# Altium PCB PCB1.PcbDoc
Units mm, origin at the board's own origin, x right, y up, seen from the top; angles counter-clockwise.
Board outline 100 x 76 mm, 2 copper layers (Top Layer, Bottom Layer), stack 1.599 mm thick; 47 components, 30 nets, 230 pads, 26 vias.
Unrouted connection lines stored in the file: 32.
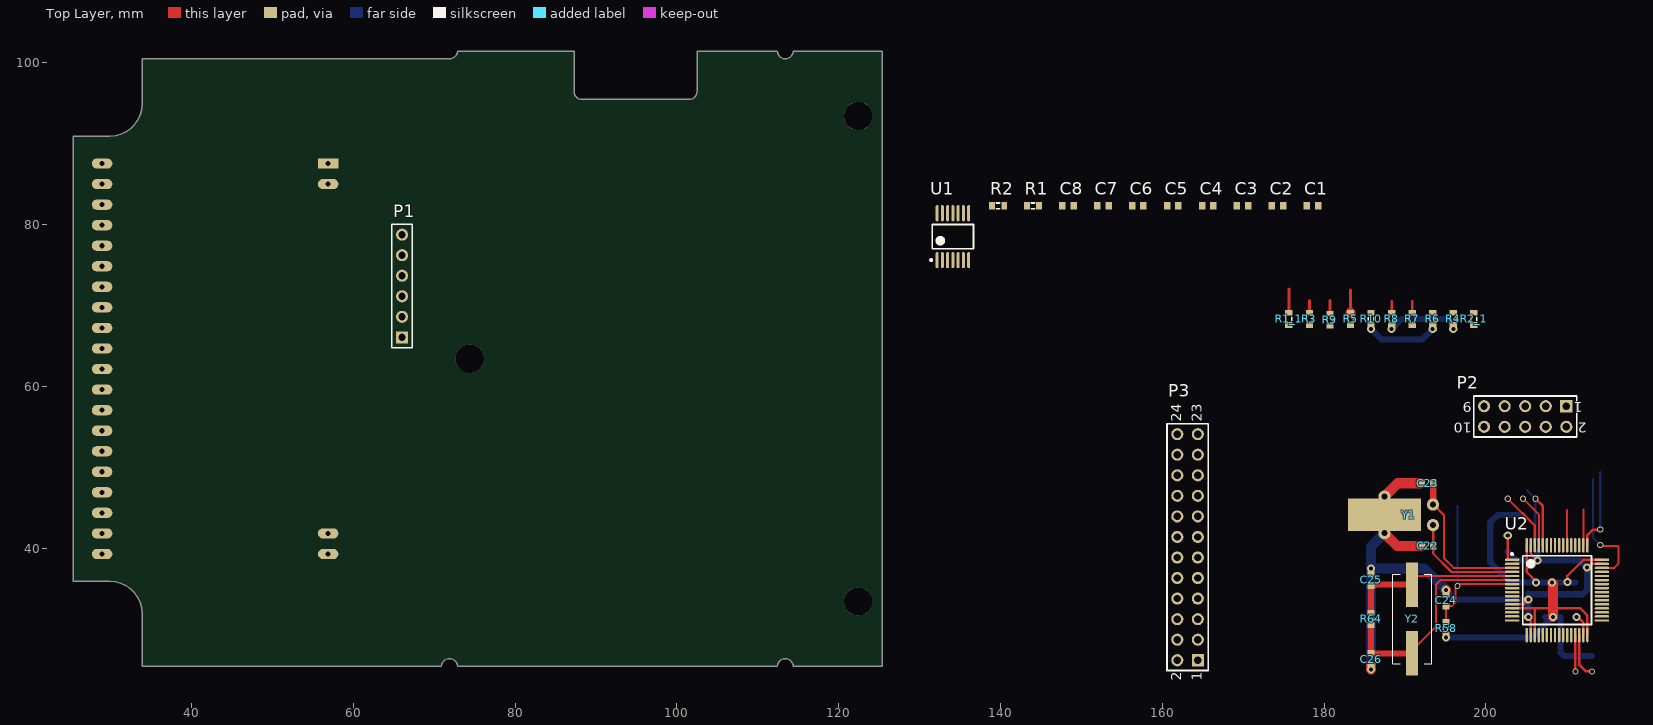
[diagram p0: Top Layer view]
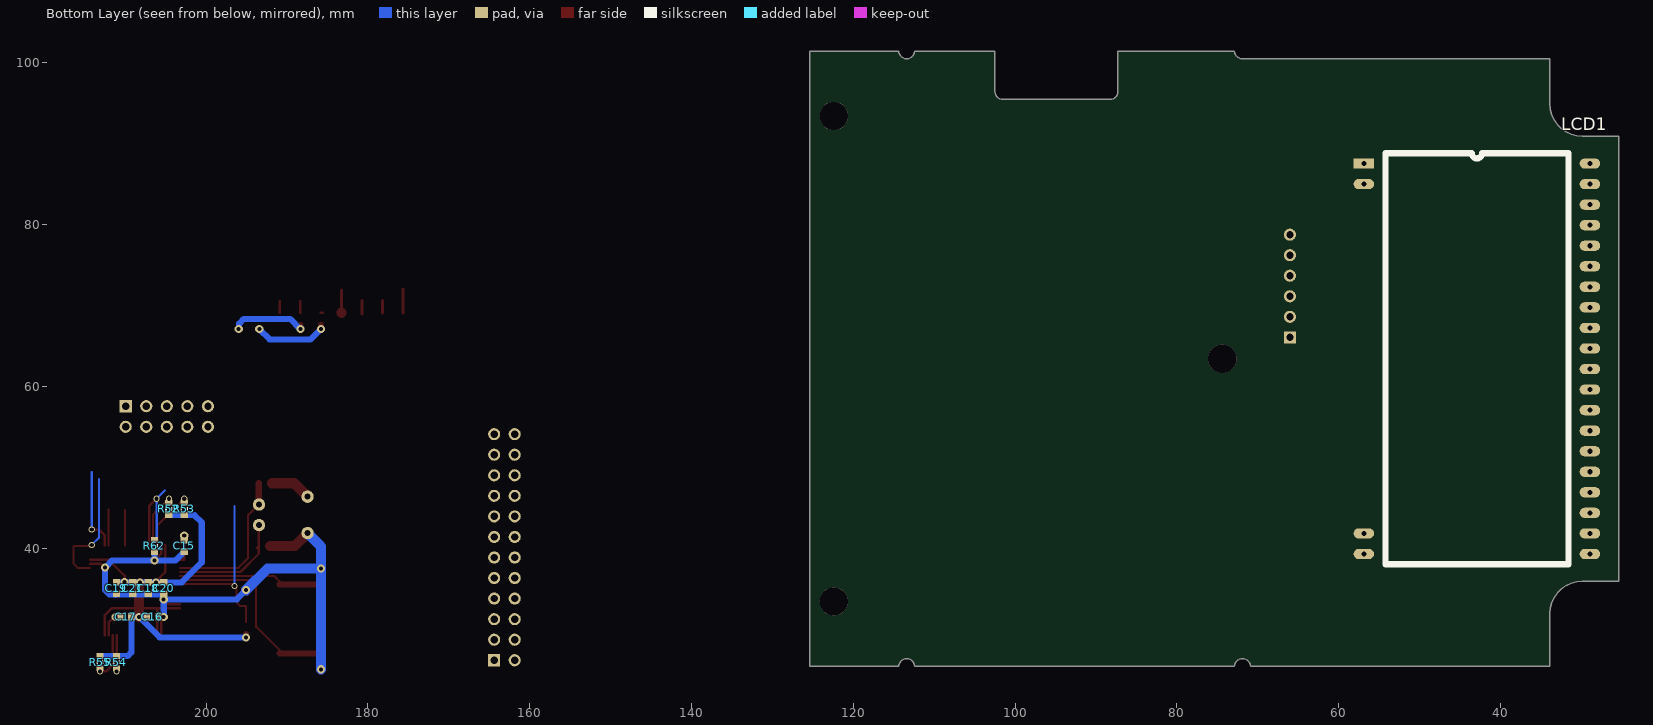
[diagram p1: Bottom Layer view, seen from below]

## Layer stack, top to bottom
Top Solder: solder mask 0.0102, Solder Resist, Dk 3.5
Top Layer: signal copper 0.0356
Dielectric 1: dielectric 1.528, FR-4, Dk 4.8
Bottom Layer: signal copper 0.0356
Bottom Solder: solder mask 0.0102, Solder Resist, Dk 3.5

## Board outline
125.4,25.4 125.4,101.4 114.397,101.4 114.357,101.192 114.274,100.996 114.151,100.823 113.995,100.68 113.812,100.572 113.611,100.506 113.4,100.483 113.189,100.506 112.988,100.572 112.805,100.68 112.649,100.823 112.526,100.996 112.443,101.192 112.403,101.4 102.5,101.4 102.5,96.45 102.475,96.227 102.401,96.016 102.282,95.826 102.123,95.668 101.934,95.549 101.722,95.475 101.5,95.45 88.3,95.45 88.077,95.475 87.866,95.549 87.676,95.668 87.518,95.826 87.399,96.016 87.325,96.227 87.3,96.45 87.3,101.4 72.897,101.4 72.857,101.192 72.774,100.996 72.651,100.823 72.495,100.68 72.312,100.572 72.111,100.506 71.9,100.483 33.9,100.483 33.9,94.9 33.839,94.205 33.659,93.532 33.364,92.9 32.964,92.329 32.471,91.836 31.9,91.436 31.268,91.141 30.595,90.961 29.9,90.9 25.4,90.9 25.4,35.9 29.9,35.9 30.595,35.839 31.268,35.659 31.9,35.364 32.471,34.964 32.964,34.471 33.364,33.9 33.659,33.268 33.839,32.595 33.9,31.9 33.9,25.4 70.903,25.4 70.943,25.608 71.026,25.804 71.149,25.977 71.305,26.12 71.488,26.228 71.689,26.294 71.9,26.317 72.111,26.294 72.312,26.228 72.495,26.12 72.651,25.977 72.774,25.804 72.857,25.608 72.897,25.4 112.403,25.4 112.443,25.608 112.526,25.804 112.649,25.977 112.805,26.12 112.988,26.228 113.189,26.294 113.4,26.317 113.611,26.294 113.812,26.228 113.995,26.12 114.151,25.977 114.274,25.804 114.357,25.608 114.397,25.4

## Design rules (kind name [scope] priority, off if disabled: settings)
BoardOutlineClearance [All] p1: gap=0.254 ignorepadtopadclearanceinfootprint=FALSE
Clearance [All] p1: gap=0.152 ignorepadtopadclearanceinfootprint=FALSE
HoleSize [All] p1: absolutevalues=TRUE maxlimit=6.3 minlimit=0.3 maxpercent=80.000 minpercent=20.000
PlaneConnect [All] p1: pad.planeconnectstyle=Relief pad.reliefexpansion=0.508 pad.reliefentries=4 pad.reliefconductorwidth=0.254 pad.reliefairgap=0.254 via.planeconnectstyle=Direct via.reliefexpansion=0.508 via.reliefentries=4 via.reliefconductorwidth=0.254 via.reliefairgap=0.254
PolygonConnect [All] p1: thpad.connectstyle=Relief thpad.reliefconductorwidth=0.254 thpad.reliefentries=4 thpad.polygonreliefangle="90 Angle" thpad.airgapwidth=0.254 smdpad.connectstyle=Relief smdpad.reliefconductorwidth=0.254 smdpad.reliefentries=4 smdpad.polygonreliefangle="90 Angle" smdpad.airgapwidth=0.254 via.connectstyle=Direct via.reliefconductorwidth=0.254 via.reliefentries=4 via.polygonreliefangle="90 Angle" via.airgapwidth=0.254
RoutingVias [All] p1: holewidth=1.016 width=1.27 viastyle="Through Hole" minholewidth=0.305 minwidth=0.508 maxholewidth=6.299 maxwidth=2.54
SolderMaskExpansion [All] p1: expansion=0.102
Width [All] p1: maxlimit=2.54 minlimit=0.152 preferedwidth=0.635
28 further rules are at their usual default settings.

## Classes and differential pairs
component class Sheet1: C1 C2 C3 C4 C5 C6 C7 C8 P1 R1 R2 U1

## Components (designator, comment, footprint, x,y, rotation, side; value= is the part's Value field where it differs from the comment)
C1 "Cap Semi" 1608[0603] 178.562,82.296 r0 top value=1uF
C2 "Cap Semi" 1608[0603] 174.244,82.296 r0 top value=1uF
C3 "Cap Semi" 1608[0603] 169.926,82.296 r0 top value=1uF
C4 "Cap Semi" 1608[0603] 165.608,82.296 r0 top value=1uF
C5 "Cap Semi" 1608[0603] 161.29,82.296 r0 top value=1uF
C6 "Cap Semi" 1608[0603] 156.972,82.296 r0 top value=1uF
C7 "Cap Semi" 1608[0603] 152.654,82.296 r0 top value=1uF
C8 "Cap Semi" 1608[0603] 148.336,82.296 r0 top value=1uF
C15 "Cap Semi" 1608[0603] 202.692,40.259 r270 bottom value=100nF
C16 "Cap Semi" 1608[0603] 206.629,31.496 r180 bottom value=100nF
C17 "Cap Semi" 1608[0603] 209.931,31.496 r0 bottom value=100nF
C18 "Cap Semi" 1608[0603] 207.137,35.052 r270 bottom value=100nF
C19 "Cap Semi" 1608[0603] 211.074,35.052 r270 bottom value=100nF
C20 "Cap Semi" 1608[0603] 205.232,35.052 r270 bottom value=100nF
C21 "Cap Semi" 1608[0603] 209.042,35.052 r270 bottom value=10uF
C22 "Cap Semi" 1608[0603] 192.786,40.259 r0 top value=10pF
C23 "Cap Semi" 1608[0603] 192.786,48.006 r0 top value=10pF
C24 "Cap Semi" 1608[0603] 195.072,33.528 r90 top value=100nF
C25 "Cap Semi" 1608[0603] 185.801,36.068 r270 top value=27pF
C26 "Cap Semi" 1608[0603] 185.801,26.289 r90 top value=27pF
LCD1 "EA DOGM132" "EA DOGM132-5" 56.896,87.528 r180 bottom
P1 "Header 6" HDR1X6 66.04,66.04 r90 top
P2 "Header 5X2" HDR2X5 209.931,57.531 r180 top
P3 "Header 12X2" HDR2X12 164.389,26.137 r90 top
R1 "Res3" J1-0603 144.018,82.296 r0 top value=22R
R1_1 "Res3" J1-0603 175.641,68.326 r270 top value=0R (schematic designator R1)
R2 "Res3" J1-0603 139.7,82.296 r0 top value=22R
R2_1 "Res3" J1-0603 198.501,68.326 r90 top value=0R (schematic designator R2)
R3 "Res3" J1-0603 178.181,68.326 r270 top value=0R
R4 "Res3" J1-0603 195.961,68.326 r90 top value=0R
R5 "Res3" J1-0603 183.261,68.326 r270 top value=0R
R6 "Res3" J1-0603 193.421,68.326 r90 top value=0R
R7 "Res3" J1-0603 190.881,68.326 r90 top value=0R
R8 "Res3" J1-0603 188.341,68.326 r90 top value=0R
R9 "Res3" J1-0603 180.721,68.211 r270 top value=0R
R10 "Res3" J1-0603 185.801,68.326 r90 top value=0R
R52 "Res3" J1-0603 204.597,44.831 r270 bottom value=4k7
R53 "Res3" J1-0603 202.692,44.831 r270 bottom value=4k7
R54 "Res3" J1-0603 211.074,25.908 r90 bottom value=4k7
R55 "Res3" J1-0603 213.106,25.908 r90 bottom value=4k7
R58 "Res3" J1-0603 195.072,30.111 r270 top value=10k
R62 "Res3" J1-0603 206.375,40.259 r90 bottom value=10k
R64 "Res3" J1-0603 185.801,31.242 r90 top value=1M
U1 "TCA6507PW" PW14_M 134.112,78.486 r90 top
U2 "STM32F103RET6" STM-LQFP64_N 208.788,34.798 r0 top
Y1 "32768Hz" Crystal32k 193.452,44.105 r90 top
Y2 "8MHz" HC-49/US 190.881,31.242 r90 top

## Footprints (in the part's own frame and the unit in brackets; to place one, negate y for a bottom-side part, rotate by r counter-clockwise, add the part's x,y. Pads: shape width x height; smd on the part's side, far side on the other; paste and mask are expansions set on the pad)
1608[0603] [mm] "Chip Capacitor, Body 1.6x0.8mm, IPC High Density"
  rect 0.8x0.9 smd: 1(-0.7,0) 2(0.7,0)
  body extent -0.87,-0.48 0.87,0.48, height 1.3
Crystal32k [mil] "32.768kHz crystal footprint"
  round 60 hole 30: 0(-88.58,236.22) 0(88.58,236.22) 1(-50,0) 2(50,0)
  rect 157.48x354.33 smd: 0(0,236.22)
  body extent -58,58 60,373, height 118
"EA DOGM132-5" [mm]
  rect 2.54x1.27 hole 0.635: 1(0,0)
  oval 2.54x1.27 hole 0.635: 2(0,-2.54) 19(0,-45.72) 20(0,-48.26) 21(27.94,-48.26) 22(27.94,-45.72) 23(27.94,-43.18) 24(27.94,-40.64) 25(27.94,-38.1) 26(27.94,-35.56) 27(27.94,-33.02) 28(27.94,-30.48) 29(27.94,-27.94) 30(27.94,-25.4) 31(27.94,-22.86) 32(27.94,-20.32) 33(27.94,-17.78) 34(27.94,-15.24) 35(27.94,-12.7) 36(27.94,-10.16) 37(27.94,-7.62) 38(27.94,-5.08) 39(27.94,-2.54) 40(27.94,0)
  silkscreen extent 2.67,-49.53 25.27,1.27, body extent -3.3,-52.47 29.7,3.33, height 8
HC-49/US [mm]
  rect 5.5x1.5 smd: 1(-4.25,0) 2(4.25,0)
  silkscreen extent -5.55,-2.41 5.55,2.41, body extent -6.85,-2.41 6.85,2.41, height 4.4
HDR1X6 [mm] "Connector; Header; 6 Position"
  rect 1.5x1.5 hole 0.9: 1(0,0)
  round 1.5 hole 0.9: 2(2.54,0) 3(5.08,0) 4(7.62,0) 5(10.16,0) 6(12.7,0)
  silkscreen extent -1.27,-1.27 13.97,1.27
HDR2X5 [mm] "Connector; Header; 5x2 Position"
  rect 1.5x1.5 hole 0.9: 1(0,0)
  round 1.5 hole 0.9: 2(0,2.54) 3(2.54,0) 4(2.54,2.54) 5(5.08,0) 6(5.08,2.54) 7(7.62,0) 8(7.62,2.54) 9(10.16,0) 10(10.16,2.54)
  silkscreen extent -1.27,-1.27 11.43,3.81
HDR2X12 [mm] "Connector; Header; 12x2 Position"
  rect 1.5x1.5 hole 0.9: 1(0,0)
  round 1.5 hole 0.9: 2(0,2.54) 3(2.54,0) 4(2.54,2.54) 5(5.08,0) 6(5.08,2.54) 7(7.62,0) 8(7.62,2.54) 9(10.16,0) 10(10.16,2.54) 11(12.7,0) 12(12.7,2.54) 13(15.24,0) 14(15.24,2.54) 15(17.78,0) 16(17.78,2.54) 17(20.32,0) 18(20.32,2.54) 19(22.86,0) 20(22.86,2.54) 21(25.4,0) 22(25.4,2.54) 23(27.94,0) 24(27.94,2.54)
  silkscreen extent -1.27,-1.27 29.21,3.81
J1-0603 [mm] "Chip Resistor, Body 1.6x0.8mm, IPC High Density"
  rect 0.7x0.9 smd: 1(-0.75,0) 2(0.75,0)
  silkscreen extent -0.2,-0.35 0.2,0.35, body extent -0.85,-0.48 0.85,0.48, height 0.9
PW14_M [mm] "TSOP, 14-Leads, Body 5x4.4mm, Pitch 0.65mm, IPC Low Density"
  oval 2x0.35 smd: 1(-2.9,1.95) 2(-2.9,1.3) 3(-2.9,0.65) 4(-2.9,0) 5(-2.9,-0.65) 6(-2.9,-1.3) 7(-2.9,-1.95) 8(2.9,-1.95) 9(2.9,-1.3) 10(2.9,-0.65) 11(2.9,0) 12(2.9,0.65) 13(2.9,1.3) 14(2.9,1.95)
  silkscreen extent -3.02,-2.55 1.5,2.8, body extent -2.25,-2.55 2.25,2.55, height 1.2
STM-LQFP64_N [mm] "Thin QFP, 64-Leads, Body 10x10mm, Pitch 0.5mm, IPC Medium Density"
  oval 1.8x0.3 smd: 1(-5.55,3.75) 2(-5.55,3.25) 3(-5.55,2.75) 4(-5.55,2.25) 5(-5.55,1.75) 6(-5.55,1.25) 7(-5.55,0.75) 8(-5.55,0.25) 9(-5.55,-0.25) 10(-5.55,-0.75) 11(-5.55,-1.25) 12(-5.55,-1.75) 13(-5.55,-2.25) 14(-5.55,-2.75) 15(-5.55,-3.25) 16(-5.55,-3.75) 33(5.55,-3.75) 34(5.55,-3.25) 35(5.55,-2.75) 36(5.55,-2.25) 37(5.55,-1.75) 38(5.55,-1.25) 39(5.55,-0.75) 40(5.55,-0.25) 41(5.55,0.25) 42(5.55,0.75) 43(5.55,1.25) 44(5.55,1.75) 45(5.55,2.25) 46(5.55,2.75) 47(5.55,3.25) 48(5.55,3.75)
  oval 0.3x1.8 smd: 17(-3.75,-5.55) 18(-3.25,-5.55) 19(-2.75,-5.55) 20(-2.25,-5.55) 21(-1.75,-5.55) 22(-1.25,-5.55) 23(-0.75,-5.55) 24(-0.25,-5.55) 25(0.25,-5.55) 26(0.75,-5.55) 27(1.25,-5.55) 28(1.75,-5.55) 29(2.25,-5.55) 30(2.75,-5.55) 31(3.25,-5.55) 32(3.75,-5.55) 49(3.75,5.55) 50(3.25,5.55) 51(2.75,5.55) 52(2.25,5.55) 53(1.75,5.55) 54(1.25,5.55) 55(0.75,5.55) 56(0.25,5.55) 57(-0.25,5.55) 58(-0.75,5.55) 59(-1.25,5.55) 60(-1.75,5.55) 61(-2.25,5.55) 62(-2.75,5.55) 63(-3.25,5.55) 64(-3.75,5.55)
  silkscreen extent -5.67,-4.25 4.25,4.57, body extent -5,-5 5,5, height 1.6

## Part data
C1 C2 C3 C4 C5 C6 C7 C8 C15 C16 C17 C18 C19 C20 C21 C22 C23 C24 C25 C26: "Capacitor (Semiconductor SIM Model)", LatestRevisionDate=29-May-2009, LatestRevisionNote="IPC-7351 Footprint Added.", PackageDescription="Chip Capacitor", PackageReference=C1206, Published=8-Jun-2000, Publisher="Altium Limited"
LCD1: "132x32 graphical LCD"
P1: "Header, 6-Pin", LatestRevisionDate=17-Jul-2002, LatestRevisionNote="Re-released for DXP Platform.", Publisher="Altium Limited"
P2: "Header, 5-Pin, Dual row", LatestRevisionDate=17-Jul-2002, LatestRevisionNote="Re-released for DXP Platform.", Publisher="Altium Limited"
P3: "Header, 12-Pin, Dual row", LatestRevisionDate=17-Jul-2002, LatestRevisionNote="Re-released for DXP Platform.", Publisher="Altium Limited"
R1 R1_1 R2 R2_1 R3 R4 R5 R6 R7 R8 R9 R10 R52 R53 R54 R55 R58 R62 R64: "Resistor", LatestRevisionDate=29-May-2009, LatestRevisionNote="IPC-7351 Footprint Added.", PackageDescription="Chip Resistor", PackageReference=J1-0603, Published=8-Jun-2000, Publisher="Altium Limited"
U1: "Low-Voltage 7-Bit I2C and SMBus LED Driver with Intensity Control and Shutdown, 1.65 to 3.6 V, -40 to 85 degC, 14-pin TSSOP (PW), Green (RoHS & no Sb/Br)", 5V Tolerant I/O=Yes, Manufacturer="Texas Instruments", Max Frequency(kHz)=400, Rating=Catalog, Supplier Part Number 1=TCA6507PW-ND, Code_JEDEC=MO-153, ComponentLink1Description=Datasheet, ComponentLink1URL=http://www.ti.com/general/docs/lit/getliterature.tsp?genericPartNumber=TCA6507&fileType=pdf, ComponentLink2Description="Package Specification", ComponentLink2URL=http://www.ti.com/litv/pdf/mpds177g, DatasheetVersion=SCPS164B, Eco-Plan="Green (RoHS & no Sb/Br)", Enable Pin=Yes, fSCLK(Max)(MHz)=400, Function="LED Driver", I2C Address=1000101, Mounting Technology="Surface Mount", On-Chip Power-on-Reset=Yes, Open Drain I/O Type=Yes, PackageDescription="14-Pin Thin Small Outline Package 0.65 mm Pitch", PackageReference=PW14, PackageVersion="revG, Feb-2011", PartNumber=TCA6507PW, SubFamily="I2C Special Function", Supplier 1=Digi-Key, Supplier 2=Farnell, Supplier 3=Newark, Supplier 4=Mouser, Supplier Part Number 2=1647813, Supplier Part Number 3=54M7301, Supplier Part Number 4=595-TCA6507PW, VCC(Max)(V)=3.6, VCC(Min)(V)=1.65, Vcc range(V)="1.65 to 3.6"
U2: "ARM Cortex-M3 32-bit MCU, 512 KB Flash, 64 KB Internal RAM, 51 I/Os, 64-pin LQFP, -40 to 85 degC, Tray", I/Os (High Current)=51, Operating Frequency(F) (Processor speed) (MHz)=72, Supplier Part Number 1=497-6444-ND, Supply Voltage(Vcc) min (V)=2, A/D Converter="3x12-bit (16 Channel)", ComponentLink1Description="Manufacturer URL", ComponentLink1URL=http://www.st.com/web/en/home.html, ComponentLink2Description=Datasheet, ComponentLink2URL=http://www.st.com/st-web-ui/static/active/en/resource/technical/document/datasheet/CD00191185.pdf, ComponentLink3Description="Package Specification", ComponentLink3URL=http://www.st.com/st-web-ui/static/active/en/resource/technical/document/datasheet/DM00037051.pdf, Core="ARM Cortex-M3", D/A Converter="2x12-bit (2 Channel)", DatasheetVersion="Rev. 8", FLASH Size (Prog) (kB)=512, Internal RAM Size (kB)=64, Mounting Technology="Surface Mount", PackageDescription="64-Pin Low Profile Quad Flat Package, 10 x 10 mm Body, 0.5 mm Pitch", PackageReference=LQFP64, PackageVersion="Rev. 4, 06/2013", Packing=Tray, PartNumber=STM32F103RET6, Supplier 1=Digi-Key, Supplier 2=Farnell, Supplier 3=Newark, Supplier 4=Newark, Supplier 5=Mouser, Supplier Part Number 2=1624138, Supplier Part Number 3=01P4101, Supplier Part Number 4=57P1231, Supplier Part Number 5=511-STM32F103RET6
Y1: library part XTAL, "Crystal Oscillator", LatestRevisionDate=17-Jul-2002, LatestRevisionNote="Re-released for DXP Platform.", PackageDescription="Crystal, Thru-Hole; 2 Leads; Body 3.1 x 8.2 mm (Dia.xH)", PackageReference=R38, Published=8-Jun-2000, Publisher="Altium Limited"
Y2: library part XTAL_1, "Crystal Oscillator", LatestRevisionDate=17-Jul-2002, LatestRevisionNote="Re-released for DXP Platform.", PackageDescription="Crystal, Thru-Hole; 2 Leads; Body 3.1 x 8.2 mm (Dia.xH)", PackageReference=R38, Published=8-Jun-2000, Publisher="Altium Limited"

## Free pads (board coordinates)
  round 3.5 hole 3.5: 1(74.4,63.4) 1(122.4,33.4) 1(122.4,93.4)

## Via types
v1: diameter 1, hole 0.5, Top Layer to Bottom Layer, tented top, 18 vias
v2: diameter 0.762, hole 0.508, Top Layer to Bottom Layer, tented top, 8 vias

## Nets (pads, with @x,y where several pads share a name; then routed paths per layer and width w, separated by ;. In a path a pad name is that pad's centre, name@x,y a point inside that pad or via, vN(x,y) a via of type N, cw(c..) or ccw(c..) an arc to the next point about the centre after c; other vN are vias at no path point)
3V3: LCD1.1 LCD1.20 U1.1
BLEN: U1.4
GND: C1.1 C2.1 C4.1 C5.1 C7.1 C8.1 LCD1.26 LCD1.33 P1.6 U1.5
LCD_A0: LCD1.38
LCD_CS: LCD1.40
LCD_RST: LCD1.39
MOSI: LCD1.36
NetC1_2: C1.2 LCD1.31 LCD1.32
NetC2_2: C2.2 LCD1.25
NetC3_1: C3.1 LCD1.30
NetC3_2: C3.2 LCD1.29
NetC4_2: C4.2 LCD1.24
NetC5_2: C5.2 LCD1.23
NetC6_1: C6.1 LCD1.28
NetC6_2: C6.2 LCD1.27
NetC7_2: C7.2 LCD1.22
NetC8_2: C8.2 LCD1.21
NetLCD1_2: LCD1.2 R1.2
NetLCD1_19: LCD1.19 R2.2
NetP1_1: P1.1 U1.10
NetP1_2: P1.2 U1.11
NetP1_3: P1.3 U1.12
NetP1_4: P1.4 U1.13
NetP1_5: P1.5 U1.14
NetR1_1: R1.1 U1.8
NetR2_1: R2.1 U1.9
SCL: U1.2
SCLK: LCD1.37
SDA: U1.3
VCC: LCD1.34 LCD1.35
pads on no net: C15.1 C15.2 C16.1 C16.2 C17.1 C17.2 C18.1 C18.2 C19.1 C19.2 C20.1 C20.2 C21.1 C21.2 C22.1 C22.2 C23.1 C23.2 C24.1 C24.2 C25.1 C25.2 C26.1 C26.2 P2.1 P2.2 P2.3 P2.4 P2.5 P2.6 P2.7 P2.8 P2.9 P2.10 P3.1 P3.2 P3.3 P3.4 P3.5 P3.6 P3.7 P3.8 P3.9 P3.10 P3.11 P3.12 P3.13 P3.14 P3.15 P3.16 P3.17 P3.18 P3.19 P3.20 P3.21 P3.22 P3.23 P3.24 R1_1.1 R1_1.2 R2_1.1 R2_1.2 R3.1 R3.2 R4.1 R4.2 R5.1 R5.2 R6.1 R6.2 R7.1 R7.2 R8.1 R8.2 R9.1 R9.2 R10.1 R10.2 R52.1 R52.2 R53.1 R53.2 R54.1 R54.2 R55.1 R55.2 R58.1 R58.2 R62.1 R62.2 R64.1 R64.2 U1.6 U1.7 U2.1 U2.2 U2.3 U2.4 U2.5 U2.6 U2.7 U2.8 U2.9 U2.10 U2.11 U2.12 U2.13 U2.14 U2.15 U2.16 U2.17 U2.18 U2.19 U2.20 U2.21 U2.22 U2.23 U2.24 U2.25 U2.26 U2.27 U2.28 U2.29 U2.30 U2.31 U2.32 U2.33 U2.34 U2.35 U2.36 U2.37 U2.38 U2.39 U2.40 U2.41 U2.42 U2.43 U2.44 U2.45 U2.46 U2.47 U2.48 U2.49 U2.50 U2.51 U2.52 U2.53 U2.54 U2.55 U2.56 U2.57 U2.58 U2.59 U2.60 U2.61 U2.62 U2.63 U2.64 Y1.0 Y1.1 Y1.2 Y2.1 Y2.2
copper on no net: | length 372.3
  Top Layer w0.254: 190.881,26.992 190.881,27.351 193.802,30.272 193.802,35.433 194.417,36.048 203.238,36.048 ; 190.881,35.492 190.881,35.851 191.578,36.548 203.238,36.548 ; 193.452,42.835 193.486,42.801 193.486,40.259 ; 193.486,45.409 194.818,44.077 194.818,38.735 196.005,37.548 203.238,37.548 ; 193.74,40.005 193.486,40.259 ; 195.072,30.861 195.072,32.828 195.769,32.828 196.215,33.274 196.215,35.052 v2(196.463,35.3) 196.711,35.548 203.238,35.548 ; 203.238,37.048 195.743,37.048 193.486,39.305 193.486,40.259 ; v2(204.597,46.101) 206.538,44.16 206.538,40.348 ; 210.038,40.348 210.038,44.684 ; 212.038,40.348 212.038,44.756 ; v2(214.122,40.386) 214.219,40.289 214.495,40.289 214.525,40.259 216.259,40.259 216.408,40.11 216.408,38.1 215.856,37.548 214.338,37.548
  Top Layer w0.305: 185.547,69.076 185.801,69.076 ; 188.341,69.076 188.341,70.485 ; 190.881,69.076 190.881,70.485 ; v2(202.692,46.101) 206.038,42.755 206.038,40.348 ; v1@202.819,41.411 v1@202.692,41.411 ; 203.238,32.548 208.28,32.548 211.673,32.548 212.538,31.683 212.538,29.248 ; 203.238,33.048 204.625,33.048 v1(205.232,33.655) ; 203.238,38.548 202.694,38.548 202.692,38.55 v1@202.692,41.411 ; 205.038,40.348 205.038,37.024 206.184,35.878 v1(206.184,35.752) ; v1(205.232,31.496) 205.232,31.294 205.538,30.988 205.538,29.248 ; 205.538,40.348 205.538,39.318 v1(206.375,38.481) ; 206.038,29.248 206.038,32.512 ; v2(206.121,46.101) 207.038,45.184 207.038,40.348 ; v1@208.153,35.687 v1(208.153,35.752) ; v1(210.058,35.814) 210.058,36.576 212.03,38.548 214.338,38.548 ; 211.038,29.248 211.038,24.801 v2(211.074,24.765) ; v1(211.201,31.496) 211.328,31.496 212.038,30.786 212.038,29.248 ; 211.538,29.248 211.538,25.571 212.344,24.765 v2(213.106,24.765) ; v1(212.483,37.592) 212.548,37.592 213.004,38.048 214.338,38.048 ; 212.538,40.348 212.538,41.596 213.233,42.291 v2(214.122,42.291) ; v1@202.692,41.411 v1(202.692,41.529) 202.574,41.411 v1@202.692,41.411
  Top Layer w0.381: 175.641,69.076 175.641,72.021 ; 178.181,69.076 178.181,70.612 ; 180.721,68.961 180.721,70.612 ; 183.261,69.076 183.261,71.894
  Top Layer w0.762: 185.801,30.492 185.801,26.989 190.878,26.989 190.881,26.992 ; 185.801,31.992 185.801,35.368 185.82,35.387 186.131,35.387 186.236,35.492 190.881,35.492 ; v1(185.801,67.056) 185.801,67.576 ; v1(188.341,67.056) 188.341,67.576 ; 193.486,45.409 193.486,48.006 ; v1(195.072,28.956) v1@195.072,29.361
  Top Layer w1.27: v1(185.801,25.019) 185.801,25.589 ; 187.452,41.855 189.048,40.259 192.086,40.259 ; 187.452,46.355 189.103,48.006 191.832,48.006 ; v1@208.153,35.687 208.28,35.56 208.28,32.548 v1(208.28,31.496)
  Bottom Layer w0.254: v2(196.463,35.3) 196.463,45.206 ; 213.233,48.514 213.233,41.275 v2(214.122,40.386)
  Bottom Layer w0.305: 205.105,47.117 v2(206.121,46.101) 206.121,41.263 206.375,41.009 ; v2(214.122,42.291) 214.122,49.403
  Bottom Layer w0.762: v1(185.801,67.056) 187.071,65.786 192.151,65.786 v1(193.421,67.056) ; v1(188.341,67.056) 189.611,68.326 195.326,68.326 195.915,67.737 195.915,67.102 v1(195.961,67.056) ; v1(195.072,28.956) 205.74,28.956 v1(208.28,31.496) ; v1(195.072,34.798) 196.215,33.655 v1(205.232,33.655) v1(205.232,31.496) ; 202.692,39.559 202.742,39.559 202.761,39.54 202.761,39.49 203.77,38.481 v1(206.375,38.481) ; 204.597,44.081 202.692,44.081 201.434,44.081 200.533,43.18 200.533,38.227 203.008,35.752 205.232,35.752 v1(206.184,35.752) 207.137,35.752 v1(208.153,35.752) 209.042,35.752 211.074,35.752 ; 205.232,34.352 205.251,34.333 205.562,34.333 205.605,34.29 211.143,34.29 ; 206.375,39.509 v1(206.375,38.481) ; 207.329,31.496 209.231,31.496 209.231,27.116 209.689,26.658 211.074,26.658 213.106,26.658 ; 211.074,34.352 211.124,34.352 211.143,34.333 211.143,34.29 ; 211.201,34.225 211.143,34.283 211.143,34.29 ; v1(206.375,38.481) 211.594,38.481 v1(212.483,37.592) 212.483,34.81 211.963,34.29 211.143,34.29
  Bottom Layer w1.27: v1(185.801,25.019) v1(185.801,37.465) ; 187.452,41.855 185.801,40.204 v1(185.801,37.465) ; v1(195.072,34.798) 192.405,37.465 v1(185.801,37.465)

## Text inside footprints (layer, text, board x,y; h text height)
P2: Top Overlay "2" at 212.471,55.499 h1.27 r180; Top Overlay "1" at 211.963,58.039 h1.27 r180; Top Overlay "9" at 198.247,58.039 h1.27 r180; Top Overlay "10" at 198.247,55.499 h1.27 r180
P3: Top Overlay "24" at 162.357,55.601 h1.27 r90; Top Overlay "23" at 164.897,55.601 h1.27 r90; Top Overlay "2" at 162.357,23.597 h1.27 r90; Top Overlay "1" at 164.897,23.597 h1.27 r90